# Altium PCB PCB_MCP_Final_PCB ASCII REV 1.00.PcbDoc
Units mm, origin at the board's own origin, x right, y up, seen from the top; angles counter-clockwise.
Board outline 100 x 60 mm, 2 copper layers (Top, Bottom), stack 1.54 mm thick; 29 components, 26 nets, 126 pads, 24 vias.
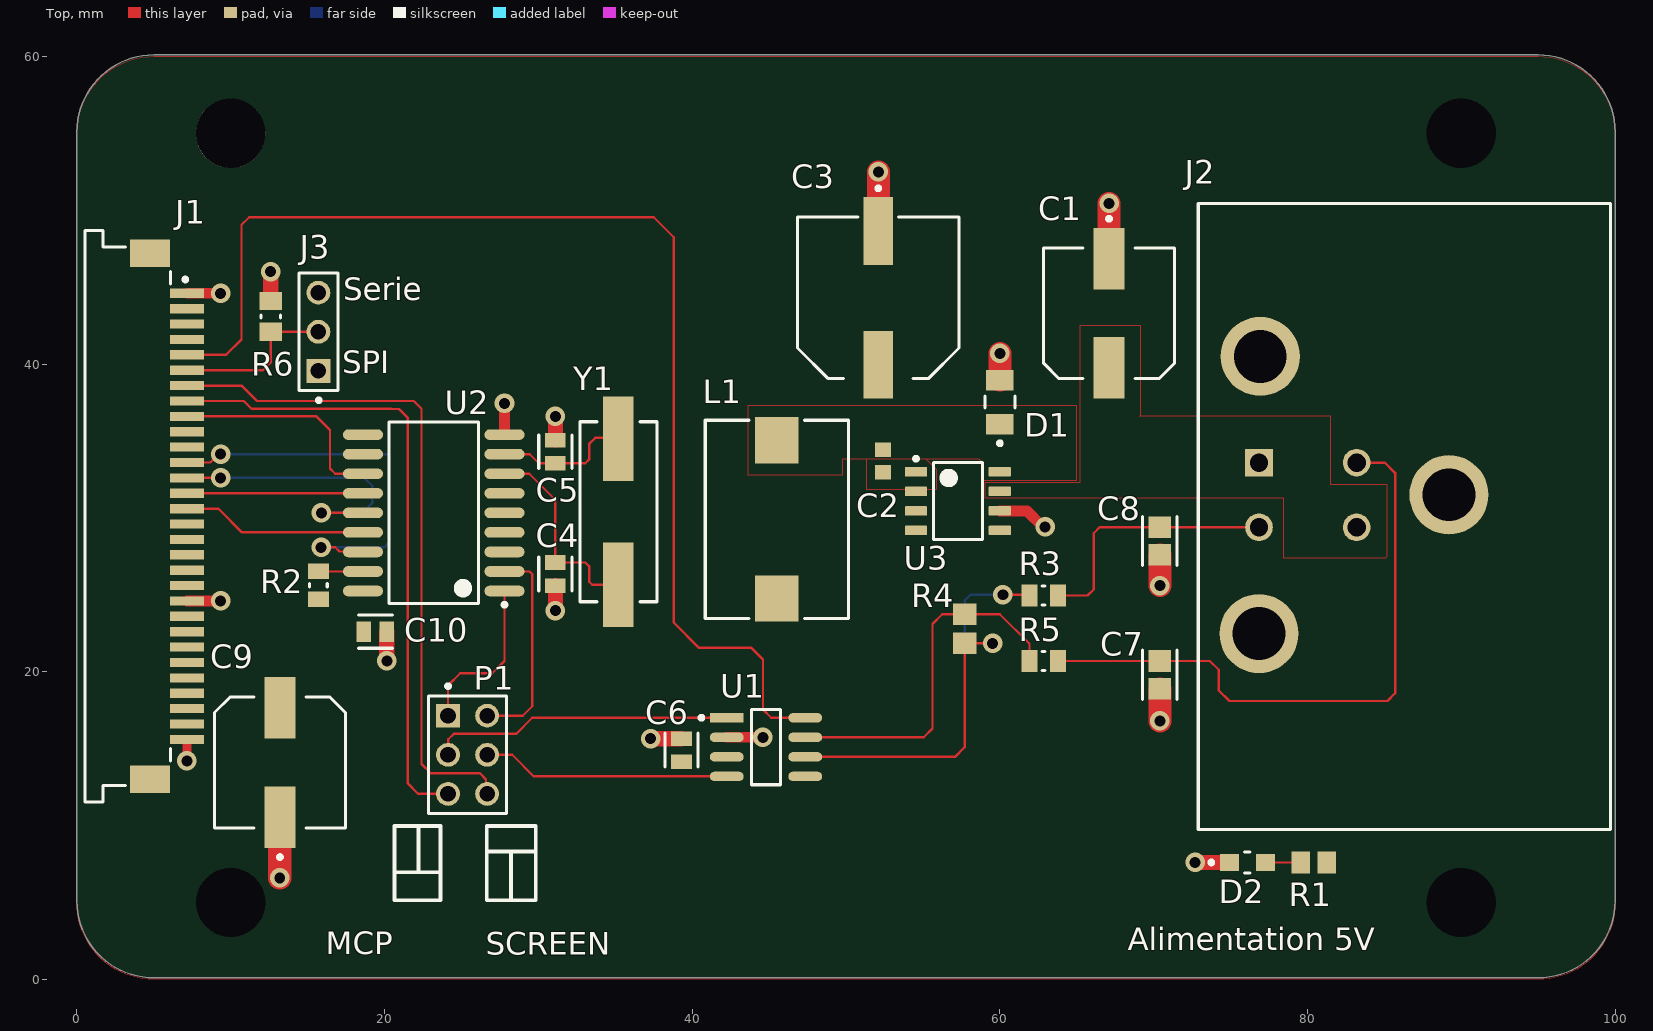
[diagram p0: Top view]
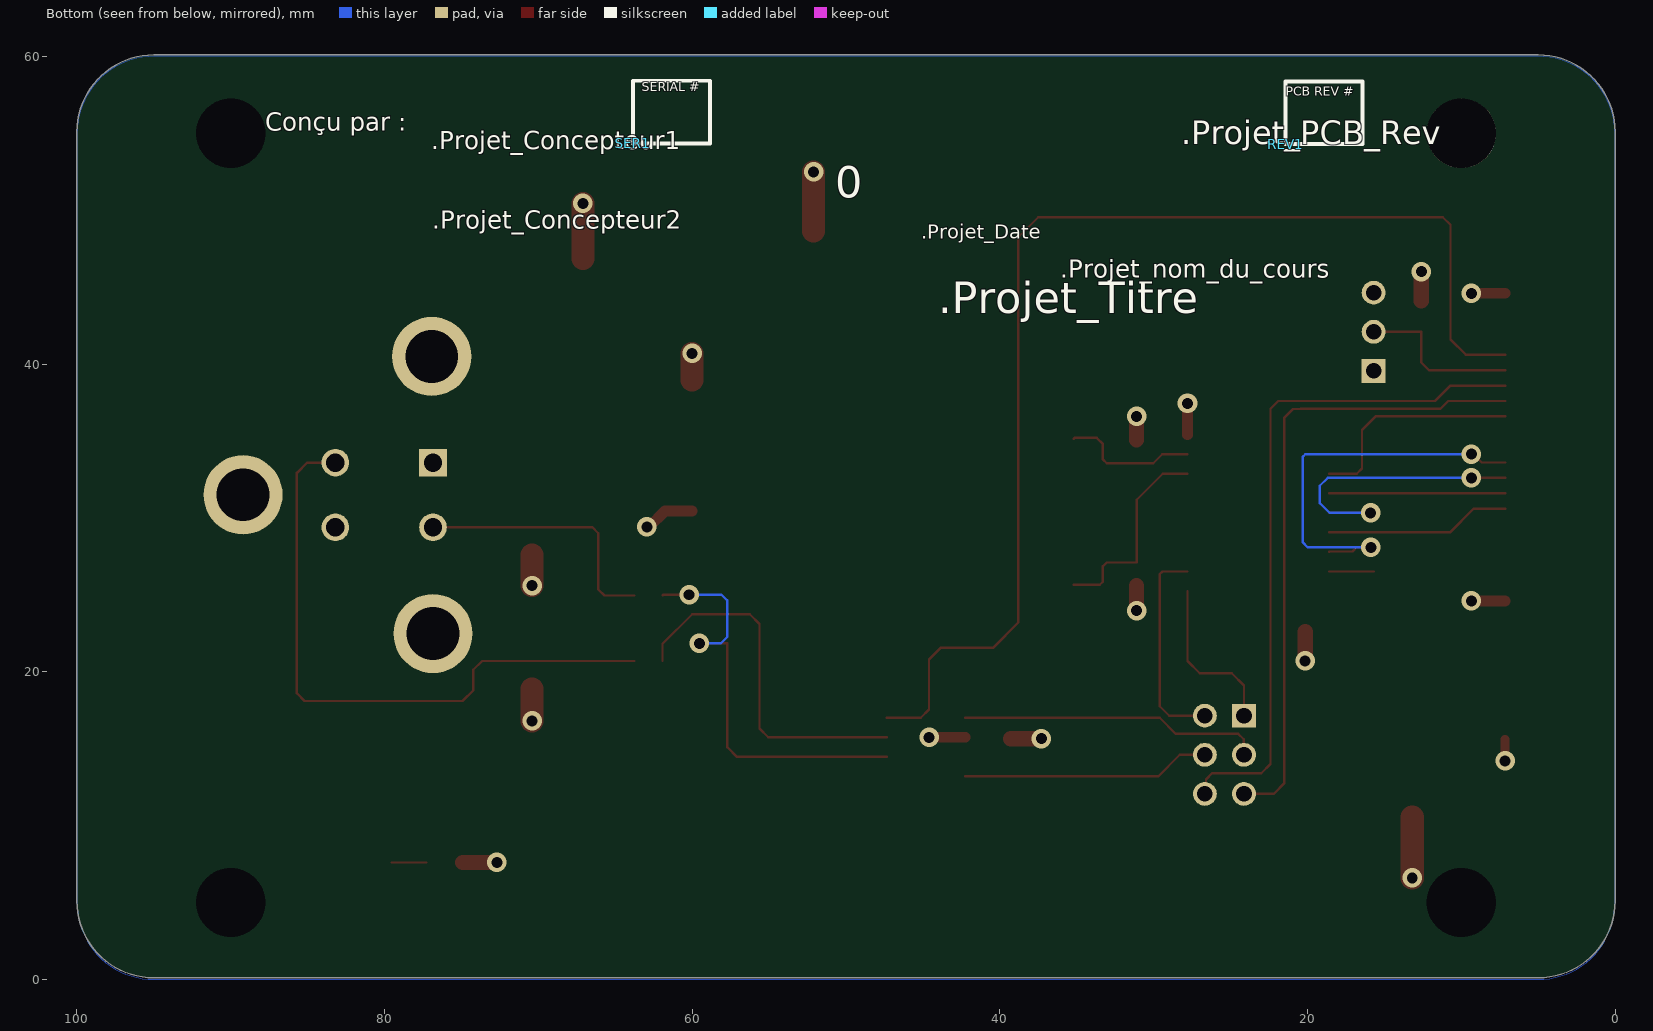
[diagram p1: Bottom view, seen from below]

## Layer stack, top to bottom
Top Solder: solder mask 0.0102, Solder Resist, Dk 3.5
Top: signal copper 0.035
Dielectric 1: core 1.47, FR-4, Dk 4.6
Bottom: signal copper 0.035
Bottom Solder: solder mask 0.0102, Solder Resist, Dk 3.5

## Board outline
0,5.1 0,55.1 cw(c5,55.1) 5,60.1 95,60.1 cw(c95,55.1) 100,55.1 100,5.1 cw(c95,5.1) 95,0.1 5,0.1 cw(c5,5.1)

## Design rules (kind name [scope] priority, off if disabled: settings)
AssemblyTestPointUsage [All] p0: scope1count=1 scope1_0_kind=Board scope1_0_value=Board scope2count=1 scope2_0_kind=Board scope2_0_value=Board commentlength=0
AssemblyTestpoint [All] p0: scope1count=1 scope1_0_kind=Board scope1_0_value=Board scope2count=1 scope2_0_kind=Board scope2_0_value=Board commentlength=0
BoardOutlineClearance [All] p0: scope1count=1 scope1_0_kind=Board scope1_0_value=Board scope2count=1 scope2_0_kind=Board scope2_0_value=Board commentlength=0 gap=0.2
BoardOutlineClearance [All] p1: gap=0.2 ignorepadtopadclearanceinfootprint=FALSE
Clearance [All] p0: scope1count=1 scope1_0_kind=Board scope1_0_value=Board scope2count=1 scope2_0_kind=Board scope2_0_value=Board commentlength=0 gap=0.152
Clearance [All] p1: gap=0.152 ignorepadtopadclearanceinfootprint=FALSE except(0: Text-Hole; 0.127: Arc-Arc Arc-Track Track-Track SMDPad-Fill SMDPad-Poly SMDPad-Region; 0.2: Arc-SMDPad Arc-Hole Track-SMDPad Track-Hole SMDPad-Hole THPad-Hole Via-Hole Fill-Hole Poly-Hole Region-Hole; 0.254: Arc-Via Track-Via Via-Via; 0.33: Arc-THPad Track-THPad; 0.5: THPad-THPad)
ComponentClearance [All] p0: scope1count=1 scope1_0_kind=Board scope1_0_value=Board scope2count=1 scope2_0_kind=Board scope2_0_value=Board commentlength=0 gap=0.102 collisioncheckmode=3
ComponentClearance [All] p1: gap=0.102 collisioncheckmode=3 verticalgap=0.102 showdistances=FALSE
DiffPairsRouting [All] p0: scope1count=1 scope1_0_kind=Board scope1_0_value=Board scope2count=1 scope2_0_kind=Board scope2_0_value=Board commentlength=0
FabricationTestPointUsage [All] p0: scope1count=1 scope1_0_kind=Board scope1_0_value=Board scope2count=1 scope2_0_kind=Board scope2_0_value=Board commentlength=0 valid=0 allowmultiple=FALSE
FabricationTestpoint [All] p0: scope1count=1 scope1_0_kind=Board scope1_0_value=Board scope2count=1 scope2_0_kind=Board scope2_0_value=Board commentlength=0 side=3 testpointundercomponent=TRUE minsize=1.016 maxsize=2.54 preferedsize=1.524 minholesize=0 maxholesize=1.016 preferedholesize=0.813 testpointgrid=0.025
FanoutControl Fanout_Default [All] p0: scope1count=1 scope1_0_kind=Board scope1_0_value=Board scope2count=1 scope2_0_kind=Board scope2_0_value=Board commentlength=30 // Fanout_Default (Default Rule)
FanoutControl Fanout_Small [All] p0 off: scope1count=1 scope1_0_kind=Board scope1_0_value=Board scope2count=1 scope2_0_kind=Board scope2_0_value=Board commentlength=84 // Protel DXP Scope 1 Expression Was: (CompPinCount < 5)   Fanout_Small (Default Rule)
FanoutControl Fanout_SOIC [All] p0 off: scope1count=1 scope1_0_kind=Board scope1_0_value=Board scope2count=1 scope2_0_kind=Board scope2_0_value=Board commentlength=71 // Protel DXP Scope 1 Expression Was: IsSOIC   Fanout_SOIC (Default Rule)
FanoutControl Fanout_LCC [All] p0 off: scope1count=1 scope1_0_kind=Board scope1_0_value=Board scope2count=1 scope2_0_kind=Board scope2_0_value=Board commentlength=69 // Protel DXP Scope 1 Expression Was: IsLCC   Fanout_LCC (Default Rule)
FanoutControl Fanout_BGA [All] p0 off: scope1count=1 scope1_0_kind=Board scope1_0_value=Board scope2count=1 scope2_0_kind=Board scope2_0_value=Board commentlength=69 // Protel DXP Scope 1 Expression Was: IsBGA   Fanout_BGA (Default Rule)
Height [All] p0: scope1count=1 scope1_0_kind=Board scope1_0_value=Board scope2count=1 scope2_0_kind=Board scope2_0_value=Board commentlength=0
Height [All] p1: minheight=0 maxheight=40 prefheight=12.7
HoleSize [All] p0: scope1count=1 scope1_0_kind=Board scope1_0_value=Board scope2count=1 scope2_0_kind=Board scope2_0_value=Board commentlength=0 absolutevalues=TRUE maxlimit=6.3 minlimit=0.3 maxpercent=80.000 minpercent=20.000
HoleSize [All] p1: absolutevalues=TRUE maxlimit=6.3 minlimit=0.3 maxpercent=80.000 minpercent=20.000
HoleToHoleClearance [All] p0: scope1count=1 scope1_0_kind=Board scope1_0_value=Board scope2count=1 scope2_0_kind=Board scope2_0_value=Board commentlength=0
HoleToHoleClearance [All] p1: gap=0.5 allowstackedmicrovias=FALSE
LayerPairs [All] p0: scope1count=1 scope1_0_kind=Board scope1_0_value=Board scope2count=1 scope2_0_kind=Board scope2_0_value=Board commentlength=0 enforce=TRUE
MinimumAnnularRing [All] p0: scope1count=1 scope1_0_kind=Board scope1_0_value=Board scope2count=1 scope2_0_kind=Board scope2_0_value=Board commentlength=0 minimumring=0.13
MinimumAnnularRing [All] p1: minimumring=0.13
MinimumSolderMaskSliver [All] p0: scope1count=1 scope1_0_kind=Board scope1_0_value=Board scope2count=1 scope2_0_kind=Board scope2_0_value=Board commentlength=0
MinimumSolderMaskSliver [All] p1: minsoldermaskwidth=0.1
NetAntennae [All] p0: scope1count=1 scope1_0_kind=Board scope1_0_value=Board scope2count=1 scope2_0_kind=Board scope2_0_value=Board commentlength=0
PasteMaskExpansion [All] p0: scope1count=1 scope1_0_kind=Board scope1_0_value=Board scope2count=1 scope2_0_kind=Board scope2_0_value=Board commentlength=0 expansion=0
PlaneClearance [All] p0: scope1count=1 scope1_0_kind=Board scope1_0_value=Board scope2count=1 scope2_0_kind=Board scope2_0_value=Board commentlength=0 clearance=0.152
PlaneClearance [All] p1: clearance=0.152
PlaneConnect [All] p0: scope1count=1 scope1_0_kind=Board scope1_0_value=Board scope2count=1 scope2_0_kind=Board scope2_0_value=Board commentlength=0 planeconnectstyle=Relief reliefexpansion=0.508 reliefentries=4 reliefconductorwidth=0.254 reliefairgap=0.254
PlaneConnect [All] p1: pad.planeconnectstyle=Relief pad.reliefexpansion=0.508 pad.reliefentries=4 pad.reliefconductorwidth=0.254 pad.reliefairgap=0.254 via.planeconnectstyle=Direct via.reliefexpansion=0.508 via.reliefentries=4 via.reliefconductorwidth=0.254 via.reliefairgap=0.254
PolygonConnect [All] p0: scope1count=1 scope1_0_kind=Board scope1_0_value=Board scope2count=1 scope2_0_kind=Board scope2_0_value=Board commentlength=0 connectstyle=Relief reliefconductorwidth=0.254 reliefentries=4 polygonreliefangle="90 Angle"
PolygonConnect [All] p1: thpad.connectstyle=Relief thpad.reliefconductorwidth=0.254 thpad.reliefentries=4 thpad.polygonreliefangle="90 Angle" thpad.airgapwidth=0.254 smdpad.connectstyle=Relief smdpad.reliefconductorwidth=0.254 smdpad.reliefentries=4 smdpad.polygonreliefangle="90 Angle" smdpad.airgapwidth=0.254 via.connectstyle=Direct via.reliefconductorwidth=0.254 via.reliefentries=4 via.polygonreliefangle="90 Angle" via.airgapwidth=0.254
RoutingCorners [All] p0: scope1count=1 scope1_0_kind=Board scope1_0_value=Board scope2count=1 scope2_0_kind=Board scope2_0_value=Board commentlength=0 cornerstyle=45-Degree minsetback=2.54 maxsetback=2.54
RoutingLayers [All] p0: scope1count=1 scope1_0_kind=Board scope1_0_value=Board scope2count=1 scope2_0_kind=Board scope2_0_value=Board commentlength=0 top layer=Automatic bottom layer=Automatic
RoutingPriority [All] p0: scope1count=1 scope1_0_kind=Board scope1_0_value=Board scope2count=1 scope2_0_kind=Board scope2_0_value=Board commentlength=0
RoutingTopology [All] p0: scope1count=1 scope1_0_kind=Board scope1_0_value=Board scope2count=1 scope2_0_kind=Board scope2_0_value=Board commentlength=0 topology=Shortest
RoutingVias [All] p0: scope1count=1 scope1_0_kind=Board scope1_0_value=Board scope2count=1 scope2_0_kind=Board scope2_0_value=Board commentlength=0 holewidth=0.3 width=0.5 viastyle="Through Hole" minholewidth=0.3 minwidth=0.5 maxholewidth=6.3 maxwidth=6.5
RoutingVias [All] p1: holewidth=0.3 width=0.5 viastyle="Through Hole" minholewidth=0.3 minwidth=0.5 maxholewidth=6.3 maxwidth=6.5
ShortCircuit [All] p0: scope1count=1 scope1_0_kind=Board scope1_0_value=Board scope2count=1 scope2_0_kind=Board scope2_0_value=Board commentlength=0 allowed=FALSE
SilkToBoardRegionClearance [All] p0: scope1count=1 scope1_0_kind=Board scope1_0_value=Board scope2count=1 scope2_0_kind=Board scope2_0_value=Board commentlength=0
SilkToSilkClearance [All] p0: scope1count=1 scope1_0_kind=Board scope1_0_value=Board scope2count=1 scope2_0_kind=Board scope2_0_value=Board commentlength=0
SilkToSilkClearance [All] p1: silktosilkclearance=0.102
SilkToSolderMaskClearance [All] p0 off: scope1count=1 scope1_0_kind=Board scope1_0_value=Board scope2count=1 scope2_0_kind=Board scope2_0_value=Board commentlength=44 // Protel DXP Scope 1 Expression Was: IsPad
SilkToSolderMaskClearance [IsPad] p1: minsilkscreentomaskgap=0.024 clearancetoexposedcopper=FALSE
SolderMaskExpansion [All] p0: scope1count=1 scope1_0_kind=Board scope1_0_value=Board scope2count=1 scope2_0_kind=Board scope2_0_value=Board commentlength=0 expansion=0.051
SolderMaskExpansion SolderMaskExpansion_Via [All] p0 off: scope1count=1 scope1_0_kind=Board scope1_0_value=Board scope2count=1 scope2_0_kind=Board scope2_0_value=Board commentlength=44 expansion=0.102 // Protel DXP Scope 1 Expression Was: isVia
SolderMaskExpansion SolderMaskExpansion_Via [isVia] p1: expansion=0.102 istentingtop=TRUE
SolderMaskExpansion [All] p2: expansion=0.051 istentingtop=FALSE
UnRoutedNet [All] p0: scope1count=1 scope1_0_kind=Board scope1_0_value=Board scope2count=1 scope2_0_kind=Board scope2_0_value=Board commentlength=0
UnpouredPolygon [All] p0: scope1count=1 scope1_0_kind=Board scope1_0_value=Board scope2count=1 scope2_0_kind=Board scope2_0_value=Board commentlength=0
Width [All] p0: scope1count=1 scope1_0_kind=Board scope1_0_value=Board scope2count=1 scope2_0_kind=Board scope2_0_value=Board commentlength=0 maxlimit=25.4 minlimit=0.127 preferedwidth=0.152
Width [All] p1: maxlimit=25.4 minlimit=0.127 preferedwidth=0.152 minimp=50.000000 maximp=50.000000 favimp=50.000000
21 further rules are at their usual default settings.

## Classes and differential pairs
component class TEMPLATE_Circuit: C1 C2 C3 C4 C5 C6 C7 C8 C9 C10 D1 D2 J1 j2 J3 L1 P1 R1 R2 R3 R4 R5 R6 U1 U2 U3 Y1
component class TEMPLATE_Title: REV1 SER1

## Components (designator, comment, footprint, x,y, rotation, side; value= is the part's Value field where it differs from the comment)
C1 "100 uF" FP-FKF-MFG 67.1,43.3 r270 top
C2 "10 nF" CAPC1608X90X35ML10T15 52.4,33.7 r90 top
C3 "68 uF" FP-OS-CON-SMT-F12-MFG 52.1,44.3 r270 top
C4 "22 pF" FP-C0805C-DN-MFG 31.1,26.35 r270 top
C5 "22 pF" FP-C0805C-DN-MFG 31.1,34.3 r90 top
C6 "22 nF" FP-C0805C-DN-MFG 39.3,14.9 r90 top
C7 "100 pF" FP-CC0805-0_1-0_7-IPC_A 70.4,19.798 r270 top
C8 "100 pF" FP-CC0805-0_1-0_7-IPC_A 70.4,28.498 r270 top
C9 "100 uF" FP-FKF-MFG 13.2,14.1 r90 top
C10 "22 nF" FP-C0805C-DN-MFG 19.4,22.6 r0 top
D1 "SS14FL" FP-425AD-MFG 60,37.53 r90 top
D2 "20mA FC / 2.2VF" FP-SML-210-MFG 76.1,7.6 r0 top
J1 "68613014422" 68613014422 3.3,30.1 r270 top
J2 "ATM13-4P-BM02" ATM134PBM02 76.85,33.59 r270 top (schematic designator j2)
J3 "90120-0763" FP-90120-0763-MFG 15.7,42.1 r90 top
L1 "47uF" NPI31W470MTRF 45.5,29.9 r270 top
P1 "TSW-103-07-G-D" SMTC-TSW-103-07-G-D_V 25.4,14.6 r270 top
R1 "150" RESC2013X60X40NL20T25 80.4,7.6 r0 top
R2 "10 K" RESC2013X60X35NL10T20 15.7,25.62 r270 top
R3 "10" RESC2013X50X30NL20T20 62.85,24.95 r180 top
R4 "120" RESC2013X60X40ML20T25 57.721,22.792 r270 top
R5 "10" RESC2013X50X30NL20T20 62.85,20.698 r180 top
R6 "1K" RESC2013X60X35ML10T20 12.6,43.1 r270 top
REV1 "Revision Cartridge Mini" REV_REVISION_CARTRIDGE_MINI 21.425,54.3 r180 bottom
SER1 "Serial Cartridge MICRO" SER_SERIAL_CARTRIDGE_MICRO 63.85,54.344 r180 bottom
U1 "TJA1050T/CM,118" FP-SOT96-1-IPC_A 44.8,15.1 r0 top
U2 "MCP2515-E/SO" SOIC-SO18_M 23.2,30.33 r180 top
U3 "LM2675MX-ADJ" D0008A_N 57.275,31.095 r0 top
Y1 "8 MHz" FOX-HC49SDLF_V 35.2,30.4 r270 top

## Footprints (in the part's own frame and the unit in brackets; to place one, negate y for a bottom-side part, rotate by r counter-clockwise, add the part's x,y. Pads: shape width x height; smd on the part's side, far side on the other; paste and mask are expansions set on the pad)
68613014422 [mm] "ZIF Connectors, Horizontal, Bottom Contact, pitch 1mm, 30p"
  rect 0.6x2.2 smd: 1(-14.5,3.85) 2(-13.5,3.85) 3(-12.5,3.85) 4(-11.5,3.85) 5(-10.5,3.85) 6(-9.5,3.85) 7(-8.5,3.85) 8(-7.5,3.85) 9(-6.5,3.85) 10(-5.5,3.85) 11(-4.5,3.85) 12(-3.5,3.85) 13(-2.5,3.85) 14(-1.5,3.85) 15(-0.5,3.85) 16(0.5,3.85) 17(1.5,3.85) 18(2.5,3.85) 19(3.5,3.85) 20(4.5,3.85) 21(5.5,3.85) 22(6.5,3.85) 23(7.5,3.85) 24(8.5,3.85) 25(9.5,3.85) 26(10.5,3.85) 27(11.5,3.85) 28(12.5,3.85) 29(13.5,3.85) 30(14.5,3.85)
  rect 1.8x2.6 smd: M1(-17.1,1.45) M2(17.1,1.45)
  silkscreen extent -18.58,-2.78 18.58,3.88
ATM134PBM02 [mm]
  rect 1.8x1.8 hole 1.2: 1(0,0)
  round 1.8 hole 1.2: 2(4.2,0) 3(0,6.35) 4(4.2,6.35)
  round 5.145 hole 3.43: MH1(-6.91,0.08) MH2(11.11,0) MH3(2.09,12.35)
  silkscreen extent -16.86,-3.95 23.84,22.85
CAPC1608X90X35ML10T15 [mm] "Chip Capacitor, 2-Leads, Body 1.7x0.9mm, IPC Low Density"
  rect 0.95x1.05 smd: 1(-0.725,0) 2(0.725,0)
D0008A_N [mm] "SOIC, 8-Leads, Body 5x4mm, Pitch 1.27mm, IPC Medium Density"
  rrect17% 1.45x0.6 smd: 1(-2.725,1.905) 2(-2.725,0.635) 3(-2.725,-0.635) 4(-2.725,-1.905) 5(2.725,-1.905) 6(2.725,-0.635) 7(2.725,0.635) 8(2.725,1.905)
  silkscreen extent -2.85,-2.5 1.6,2.88
FOX-HC49SDLF_V [mm] "SMD, 2-Leads, Body 5x11.7mm"
  rect 5.5x2 smd: 1(-4.75,0) 2(4.75,0)
  silkscreen extent -5.85,-2.5 5.85,2.5
FP-425AD-MFG [mm]
  rect 1.34x1.8 smd paste+0 mask+0: 1(-1.43,0) 2(1.43,0)
  silkscreen extent -2.8,-0.97 0.39,0.97
FP-90120-0763-MFG [mm]
  rect 1.55x1.55 hole 1 paste+0 mask+0: 1(-2.54,0)
  round 1.55 hole 1 paste+0 mask+0: 2(0,0) 3(2.54,0)
  silkscreen extent -4.57,-1.27 3.81,1.27
FP-C0805C-DN-MFG [mm]
  rect 0.95x1.35 smd paste+0 mask+0: 1(-0.75,0) 2(0.75,0)
  silkscreen extent -1.1,-1.07 1.1,1.07
FP-CC0805-0_1-0_7-IPC_A [mm]
  rect 1.408x1.462 smd paste+0 mask+0: 1(-0.902,0) 2(0.902,0)
  silkscreen extent -1.61,-1.13 1.61,1.13
FP-FKF-MFG [mm]
  rect 4x2 smd paste+0 mask+0: 1(-3.55,0) 2(3.55,0)
  silkscreen extent -6.27,-4.25 4.25,4.25
FP-OS-CON-SMT-F12-MFG [mm]
  rect 4.4x1.9 smd paste+0 mask+0: 1(-4.35,0) 2(4.35,0)
  silkscreen extent -7.25,-5.25 5.25,5.25
FP-SML-210-MFG [mm]
  rect 1.25x1.1 smd paste+0 mask+0: 1(-1.175,0) 2(1.175,0)
  silkscreen extent -2.47,-0.67 0.18,0.67
FP-SOT96-1-IPC_A [mm]
  rect 2.204x0.608 smd paste+0 mask+0: 1(-2.551,1.905)
  rrect100% 2.204x0.608 smd paste+0 mask+0: 2(-2.551,0.635) 3(-2.551,-0.635) 4(-2.551,-1.905) 5(2.551,-1.905) 6(2.551,-0.635) 7(2.551,0.635) 8(2.551,1.905)
  silkscreen extent -4.33,-2.45 0.95,2.45
NPI31W470MTRF [mm]
  rect 3x2.8 smd: 1(-5.15,0) 2(5.15,0)
  silkscreen extent -6.45,-4.65 6.45,4.65
RESC2013X50X30NL20T20 [mm] "Chip Resistor, 2-Leads, Body 2.00x1.25mm, IPC Medium Density"
  rect 1.05x1.45 smd: 1(-0.925,0) 2(0.925,0)
  silkscreen extent -0.1,-0.63 0.1,0.63
RESC2013X60X35ML10T20 [mm] "Chip Resistor, 2-Leads, Body 2.1x1.35mm, IPC Low Density"
  rect 1.2x1.45 smd: 1(-1,0) 2(1,0)
  silkscreen extent -0.1,-0.63 0.1,0.63
RESC2013X60X35NL10T20 [mm] "Chip Resistor, 2-Leads, Body 2.1x1.35mm, IPC Medium Density"
  rect 1x1.35 smd: 1(-0.9,0) 2(0.9,0)
  silkscreen extent -0.1,-0.58 0.1,0.58
RESC2013X60X40ML20T25 [mm] "Chip Resistor, 2-Leads, Body 2.00x1.25mm, IPC Low Density"
  rect 1.4x1.55 smd: 1(-0.95,0) 2(0.95,0)
RESC2013X60X40NL20T25 [mm] "Chip Resistor, 2-Leads, Body 2.00x1.25mm, IPC Medium Density"
  rect 1.2x1.45 smd: 1(-0.85,0) 2(0.85,0)
REV_REVISION_CARTRIDGE_MINI [mm]
  silkscreen extent 0,0 5,4.08
SER_SERIAL_CARTRIDGE_MICRO [mm]
  silkscreen extent 0,0 5,4.08
SMTC-TSW-103-07-G-D_V [mm] "THD, 6-Leads, Body 7.62x5.08mm, Pitch 2.54mm"
  rect 1.55x1.55 hole 1.02: 1(-2.54,-1.27)
  round 1.55 hole 1.02: 2(-2.54,1.27) 3(0,-1.27) 4(0,1.27) 5(2.54,-1.27) 6(2.54,1.27)
  silkscreen extent -4.58,-2.54 3.81,2.54
SOIC-SO18_M [mm] "SOIC, 18-Leads, Body 11.6x7.5mm, Pitch 1.27mm, IPC Low Density"
  oval 2.6x0.7 smd: 1(-4.6,5.08) 2(-4.6,3.81) 3(-4.6,2.54) 4(-4.6,1.27) 5(-4.6,0) 6(-4.6,-1.27) 7(-4.6,-2.54) 8(-4.6,-3.81) 9(-4.6,-5.08) 10(4.6,-5.08) 11(4.6,-3.81) 12(4.6,-2.54) 13(4.6,-1.27) 14(4.6,0) 15(4.6,1.27) 16(4.6,2.54) 17(4.6,3.81) 18(4.6,5.08)
  silkscreen extent -4.72,-5.9 2.9,6.1

## Part data
C1 C9: library part CMP-2000-06208-3, "CAP ALUM 100UF 20% 50V SMD"
C2: library part CMP-2100-03642-1, "Chip Capacitor, 10 nF, +/- 10%, 50 V, -55 to 125 degC, 0603 (1608 Metric), RoHS, Tape and Reel"
C3: library part CMP-05428-000631-1, "Conductive Polymer Aluminum Solid Capacitors (OS-CON) 68uF ±20% 50V RADIAL SMT 10x12.6mm"
C4 C5: library part CMP-2007-00048-2, "Capacitor; Ceramic; Cap; 22.0pF; Tol 5%; SMT; Vol-Rtg 50V; C0G; Tape and Reel"
C6 C10: library part CMP-2007-00338-2, "CAP CER 0.022UF 50V X7R 0805"
C7 C8: library part CMP-03422-001508-1, "CAP CER 100PF 50V C0G/NPO 0805"
D1: library part CMP-07162-000013-1, "DIODE SCHOTTKY 40V 1A SOD123F"
D2: library part CMP-08952-000013-1, "LED GREEN CLEAR 0805 SMD"
J1: library part CMP-1502-01467-2
J3: library part CMP-04776-000084-1, "CONN HEADER VERT 3POS 2.54MM"
L1: library part TEMPLATE_Circuit
P1: library part CMP-2000-07329-1, "Through Hole Header, Pitch 2.54 mm, 2 x 3 Position, Height 8.58 mm, Tail Length 2.54 mm, -55 to 125 degC, RoHS, Bulk"
R1: library part CMP-2001-00596-1
R2: library part CMP-1659-00013-4, "Chip Resistor, 10 KOhm, +/- 1%, 0.125 W, -55 to 155 degC, 0805 (2012 Metric), RoHS, Tape and Reel"
R3 R5: library part CMP-2001-04915-1
R4: library part CMP-2001-00588-1
R6: library part CMP-2100-03671-1, "Chip Resistor, 1 KOhm, +/- 1%, 125 mW, -55 to 155 degC, 0805 (2012 Metric), RoHS, Tape and Reel"
REV1: library part CMP-008-000037-1, "REV - REVISION CARTRIDGE MINI"
SER1: library part CMP-008-000042-1, "SER - SERIAL CARTRIDGE MICRO"
U1: library part CMP-2000-04923-2, "IC TRANSCEIVER HALF 1/1 8SO"
U2: library part CMP-0186-00035-2, "Stand-Alone CAN Controller With SPI Interface, 18-Pin SOIC, Extended Temperature"
U3: library part CMP-0069-00674-3, "SIMPLE SWITCHER® Power Converter High Efficiency 1A Step-Down Voltage Regulator, 8-pin Narrow SOIC"
Y1: library part CMP-2100-03639-1, "Resistance Weld Crystal, 8 MHz, +/- 30 ppm, -20 to 70 degC, 2-Pin SMD, RoHS, Tape and Reel"

## Free pads (board coordinates)
  round 1.524 hole 4.5 unplated: ""(10,5) ""(90,5) ""(90,55)
  round 4.5 hole 4.5 unplated: ""(10,55)

## Via types
v1: diameter 1.27, hole 0.711, Top to Bottom, tented both sides, 24 vias

## Nets (pads, with @x,y where several pads share a name; then routed paths per layer and width w, separated by ;. In a path a pad name is that pad's centre, name@x,y a point inside that pad or via, vN(x,y) a via of type N, cw(c..) or ccw(c..) an arc to the next point about the centre after c; other vN are vias at no path point)
+5: C3.2 C6.1 C9.2 C10.1 J1.25 J1.26 J1.27 J1.28 J1.29 J3.1 L1.2 R1.2 R2.2 U1.3 U2.18 U3.4
+12: C1.2 J2.4 U3.7
CLOCK: J1.14 U2.13 | length 11.5
  Top w0.152: J1.14 U2.13
CS: J1.12 U2.16 | length 26.4
  Top w0.152: J1.12 8.669,33.6 9.209,34.14 v1(9.35,34.14) ; v1(15.877,28.088) 16.798,28.088 17.071,27.815 18.575,27.815 U2.16
  Bottom w0.152: v1(9.35,34.14) 20.15,34.14 20.3,33.99 20.3,28.4 19.988,28.088 v1(15.877,28.088)
Enable: J1.5 U1.8 | length 78.3
  Top w0.152: J1.5 9.7,40.6 10.7,41.6 10.7,45.2 10.701,45.201 10.701,49.051 11.2,49.55 37.5,49.55 38.8,48.25 38.8,23.2 40.45,21.55 43.851,21.55 44.6,20.801 44.6,17.55 45.145,17.005 U1.8
GND: C1.1 C3.1 C4.2 C5.2 C6.2 C7.2 C8.2 C9.1 C10.2 D1.2 D2.1 J1.1 J1.21 J1.30 J2.1 J3.3 R6.1 U1.2 U2.9 U3.6 | length 42
  Top w0.152: C9.1@13.189,10.539 C9.1 ; C4.2 C4.2@31.111,25.589 ; C5.2 C5.2@31.111,35.061 ; U3.6 U3.6@60.018,30.442 ; C1.1 C1.1@67.111,46.861 ; C7.2 C7.2@70.411,18.885
  Top w0.6: v1(7.15,14.2) J1.30
  Top w0.7: J1.21 v1(9.35,24.6) ; J1.1 v1(9.35,44.6) ; U2.9 v1(27.8,37.438) ; U1.2 v1(44.6,15.735) ; U3.6@60.018,30.442 61.775,30.442 62.796,29.422 v1(62.95,29.422)
  Top w1: R6.1 v1(12.6,46.01) ; v1(20.15,20.7) C10.2 ; v1(31.111,23.97) C4.2@31.111,25.589 ; C5.2@31.111,35.061 v1(31.111,36.6) ; v1(37.3,15.65) C6.2 ; v1(72.7,7.6) D2.1
  Top w1.5: v1(13.189,6.6) C9.1@13.189,10.539 ; C3.1 v1(52.1,52.5) ; D1.2 v1(60,40.7) ; C1.1@67.111,46.861 v1(67.111,50.45) ; v1(70.4,25.6) C8.2 ; v1(70.411,16.798) C7.2@70.411,18.885
GPIO_3: J1.7 P1.6 | length 44.6
  Top w0.152: J1.7 10.701,38.6 11.701,37.6 21.9,37.6 22.4,37.1 22.4,14 23.002,13.398 26.202,13.398 26.6,13 26.6,12.13 P1.6
GPIO_4: J1.8 P1.5 | length 41.5
  Top w0.152: J1.8 10.85,37.6 11.35,37.1 20.448,37.1 20.465,37.083 20.937,37.083 21.5,36.52 21.5,12.756 22.196,12.06 P1.5
INT: J1.9 U2.12 | length 14.5
  Top w0.152: J1.9 15.57,36.6 16.45,35.72 16.45,33.22 16.8,32.87 U2.12
MISO: J1.15 U2.15 | length 12.1
  Top w0.152: J1.15 9.2,30.6 10.74,29.06 U2.15
MOSI: J1.13 U2.14 | length 19.7
  Top w0.152: J1.13 v1(9.35,32.6) ; v1(15.888,30.33) U2.14
  Bottom w0.152: v1(9.35,32.6) 18.686,32.6 19.2,32.086 19.2,30.961 18.569,30.33 v1(15.888,30.33)
NetC2_1: C2.1 U3.1
NetC2_2: C2.2 D1.1 L1.1 U3.8
NetC4_1: C4.1 U2.7 Y1.2 | length 13.4
  Top w0.152: U2.7 29.405,32.87 31.1,31.175 C4.1 33.05,27.1 33.3,26.85 33.3,25.85 33.5,25.65 Y1.2
NetC5_1: C5.1 U2.8 Y1.1 | length 8.9
  Top w0.152: U2.8 29.435,34.14 30.025,33.55 C5.1 33.05,33.55 33.3,33.8 33.3,34.8 33.7,35.2 35.15,35.2 Y1.1
NetC7_1: C7.1 J2.3 R5.1 | length 41.1
  Top w0.152: R5.1 63.777,20.7 C7.1 73.652,20.7 74.23,20.122 74.23,18.789 74.925,18.094 85.194,18.094 85.7,18.6 85.7,32.927 85.037,33.59 J2.3
NetC8_1: C8.1 J2.2 R3.1 | length 17.1
  Top w0.152: R3.1 65.705,24.95 66.1,25.345 66.1,29 66.5,29.4 C8.1 70.41,29.39 J2.2
NetD2_2: D2.2 R1.1 | length 2.3
  Top w0.152: D2.2 R1.1
NetJ1_6: J1.6 J3.2 R6.2 | length 10.8
  Top w0.152: J1.6 12.1,39.6 12.6,40.1 R6.2 J3.2
NetR2_1: R2.1 U2.17 | length 2.9
  Top w0.152: R2.1 U2.17
NetR3_2: R3.2 R4.2 U1.6 | length 27.9
  Top w0.152: U1.6 57.086,14.465 57.721,15.1 R4.2 v1(59.526,21.842) ; v1(60.202,25.005) 61.87,25.005 R3.2
  Bottom w0.152: v1(59.526,21.842) 58.142,21.842 57.721,22.262 57.721,24.636 58.09,25.005 v1(60.202,25.005)
NetR4_1: R4.1 R5.2 U1.7 | length 23.8
  Top w0.152: U1.7 55.056,15.735 55.621,16.3 55.621,23.101 56.262,23.742 R4.1 59.997,23.742 61.925,21.814 R5.2
RX_MCP: P1.2 U2.2 | length 13.7
  Top w0.152: P1.2 28.99,17.14 29.6,17.75 29.6,26.35 29.43,26.52 U2.2
RX_TJA: P1.4 U1.4 | length 16.2
  Top w0.152: P1.4 28.297,14.6 29.702,13.195 U1.4
TX_MCP: P1.1 U2.1 | length 10.8
  Top w0.152: P1.1 24.13,19.11 24.92,19.9 27,19.9 27.8,20.7 U2.1
TX_TJA: P1.3 U1.1 | length 19.7
  Top w0.152: P1.3 24.145,14.615 24.145,15.604 24.5,15.959 28.559,15.959 29.605,17.005 U1.1
pads on no net: J1.2 J1.3 J1.4 J1.10 J1.11 J1.16 J1.17 J1.18 J1.19 J1.20 J1.22 J1.23 J1.24 J1.M1 J1.M2 J2.MH1 J2.MH2 J2.MH3 U1.5 U2.3 U2.4 U2.5 U2.6 U2.10 U2.11 U3.2 U3.3 U3.5

## Polygon pours and split planes (outlines as drawn)
+5 on Top "+5_L01_P008" (solid, pour order 8): 0,5 0,55 cw(c5,55) 5,60 95,60 cw(c95,55) 100,55 100,5 cw(c95,5) 95,0 5,0 cw(c5,5)
+12 on Top "+12_L01_P000" (solid, pour order 0): 78.43,31.3 78.43,27.4 85.104,27.4 85.202,27.498 85.202,32.144 81.516,32.144 81.5,32.161 81.5,36.6 69.1,36.6 69.169,36.669 69.169,42.5 65.2,42.5 65.2,32.3 59.025,32.3 59.025,31.3
NetC2_1 on Top "NETC2_1_L01_P002" (solid, pour order 2): 51.35,33.845 55.198,33.845 55.878,33.165 55.878,31.825 51.35,31.825
NetC2_2 on Top "NETC2_2_L01_P001" (solid, pour order 1): 58.875,32.436 65,32.436 65,37.3 43.6,37.3 43.6,32.8 49.8,32.8 49.8,33.845 58.625,33.845 58.875,33.595
GND on Bottom "GND_L02_P006" (solid, pour order 6): 0,5 0,55 cw(c5,55) 5,60 95,60 cw(c95,55) 100,55 100,5 cw(c95,5) 95,0 5,0 cw(c5,5)

## Silkscreen, mask and mechanical layers (free items; w line width, h text height)
Top Overlay:
  lines w0.254: 20.648,9.966 22.219,9.966 ; 20.648,9.966 20.648,6.966 22.219,6.966 ; 20.648,9.966 23.648,9.966 ; 20.648,9.966 20.648,5.144 23.648,5.144 23.648,9.966 ; 22.219,6.966 22.219,9.966 ; 22.219,6.966 23.648,6.966 23.648,9.966 ; 22.219,6.966 22.219,9.966 ; 22.219,9.966 23.648,9.966 ; 26.648,5.144 28.229,5.144 ; 26.648,5.144 26.648,8.316 28.229,8.316 ; 26.648,5.144 29.833,5.144 ; 26.648,5.144 26.648,9.966 29.833,9.966 29.833,5.144 ; 28.229,5.144 29.833,5.144 ; 28.229,5.144 28.229,8.316 ; 28.229,5.144 28.229,8.316 ; 28.229,8.316 29.833,8.316 29.833,5.144
  text "Serie" at 17.323,43.668 h2.5
  text "SPI" at 17.266,38.906 h2.5
  text "Alimentation 5V" at 68.326,1.4 h2.5
  text "MCP" at 16.177,1.153 h2.5
  text "SCREEN" at 26.587,1.112 h2.5
Bottom Overlay:
  text "Conçu par :" at 87.75,54.778 h2
  text ".Projet_Concepteur1" at 76.977,53.566 h2
  text "0" at 50.707,50.128 h3.5
  text ".Projet_Concepteur2" at 76.9,48.4 h2
  text ".Projet_Date" at 45.1,48.153 h0.91
  text ".Projet_nom_du_cours" at 36.079,45.209 h2
  text ".Projet_Titre" at 44.009,42.62 h3.5
Board Outline:
  lines w0.254: 0,5 ccw(c5,5) 5,0 95,0 ccw(c95,5) 100,5 100,55 ccw(c95,55) 95,60 5,60 ccw(c5,55) 0,55 0,5

## Text inside footprints (layer, text, board x,y; h text height)
REV1: Bottom Overlay "PCB REV #" at 21.425,57.25 h1
SER1: Bottom Overlay "SERIAL #" at 63.287,57.536 h1